# Altium PCB Main.PcbDoc (part 1 of 2)
Units mil, origin at the board's own origin, x right, y up, seen from the top; angles counter-clockwise.
Board outline 5112 x 2752 mil, 4 copper layers (Signal Layer 1, Ground Plane, Voltage Plane, Signal Layer 2), stack 40.4 mil thick; 233 components, 150 nets, 676 pads, 338 vias.
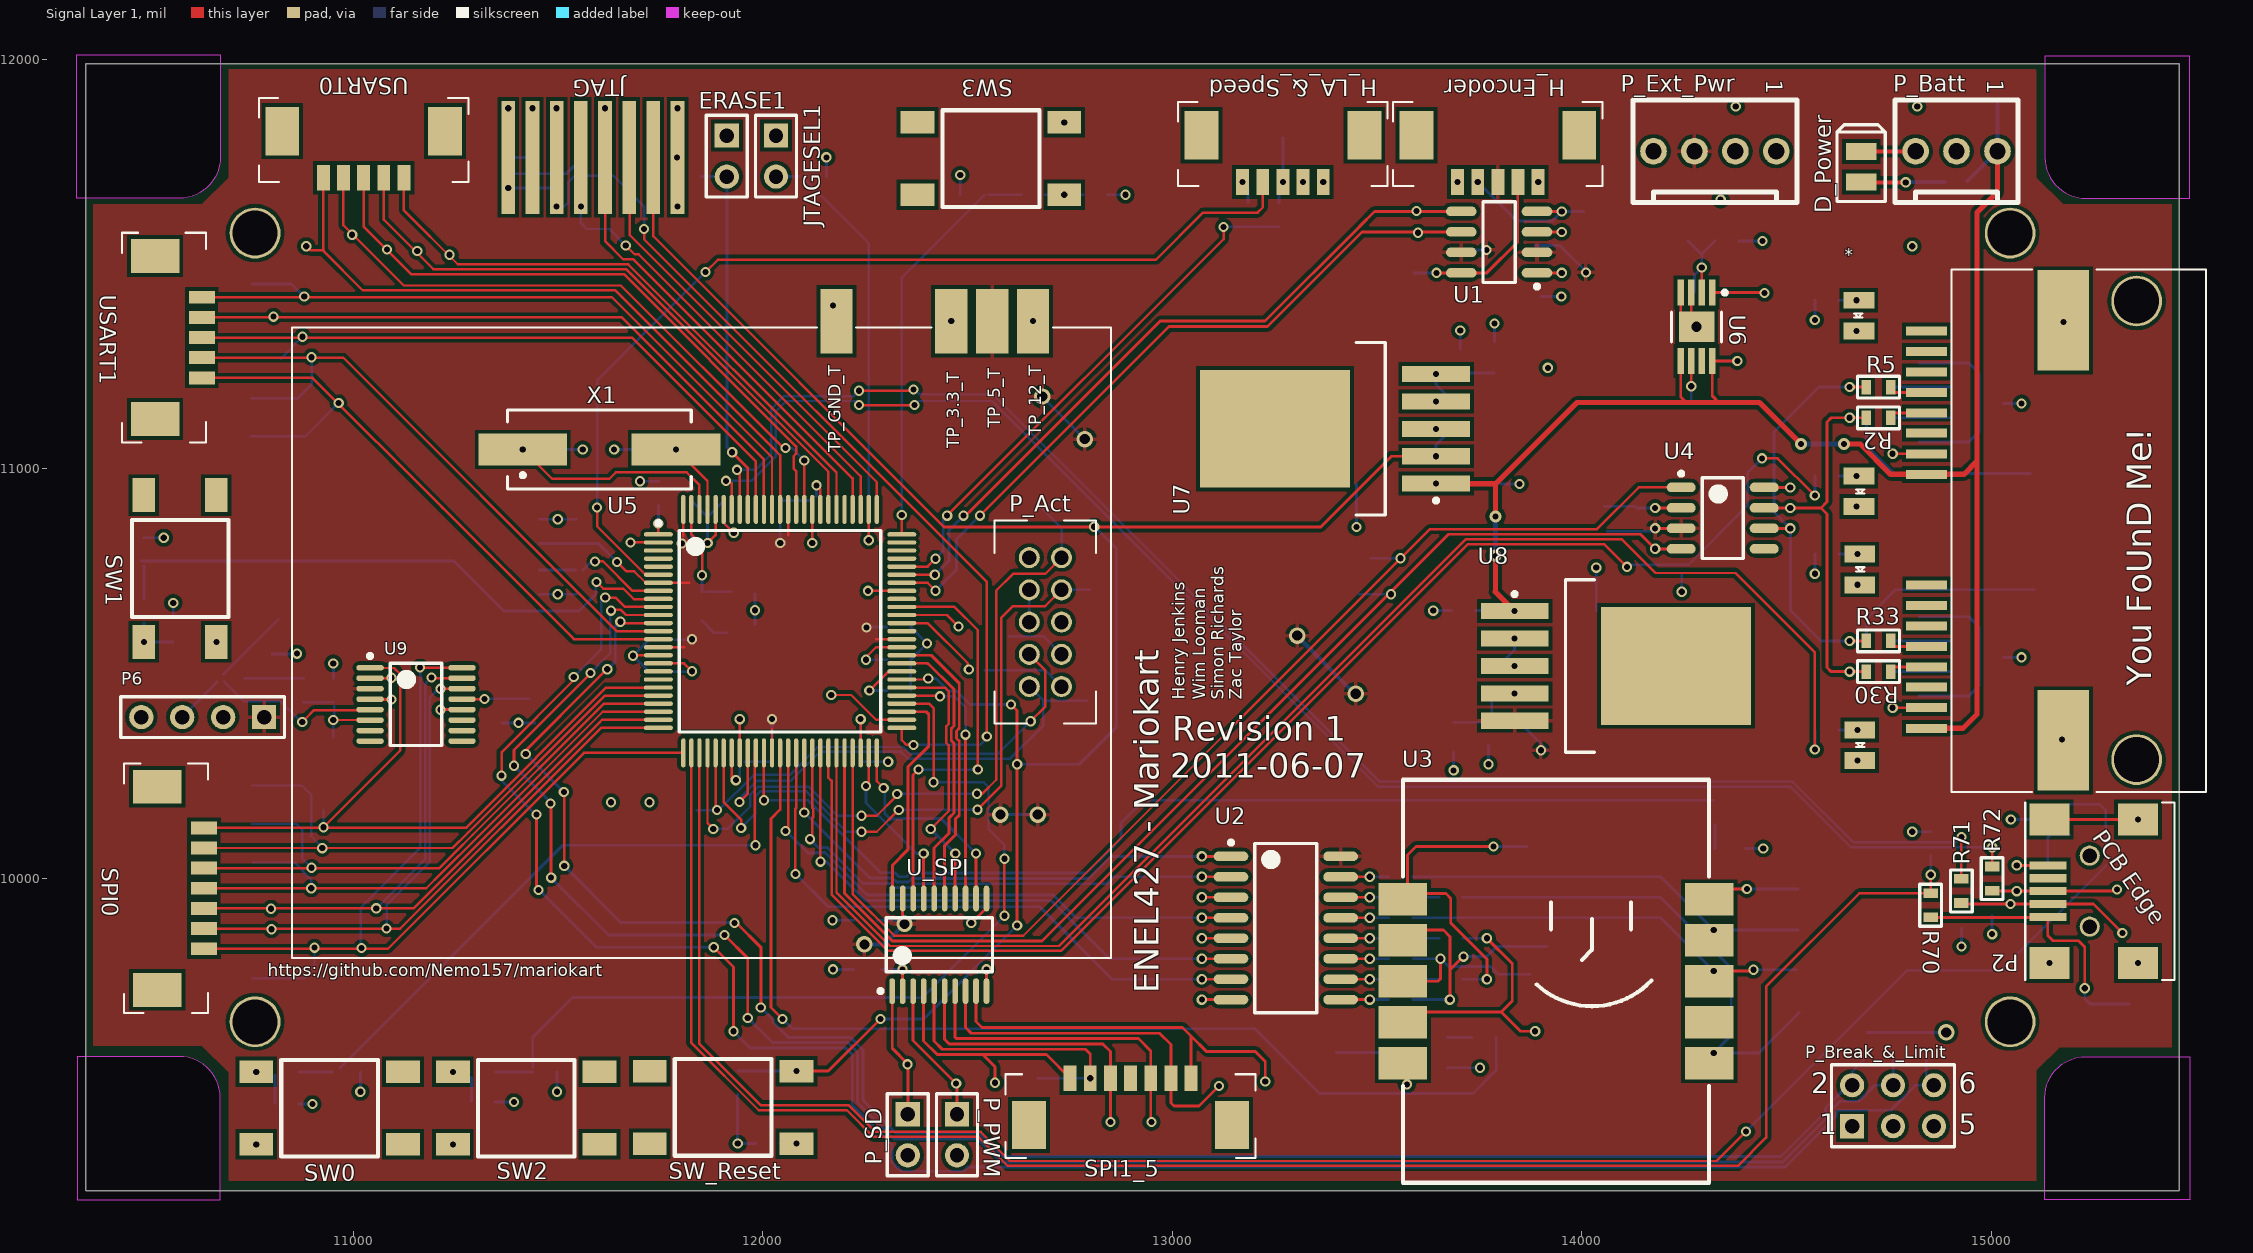
[diagram p0: Signal Layer 1 view]
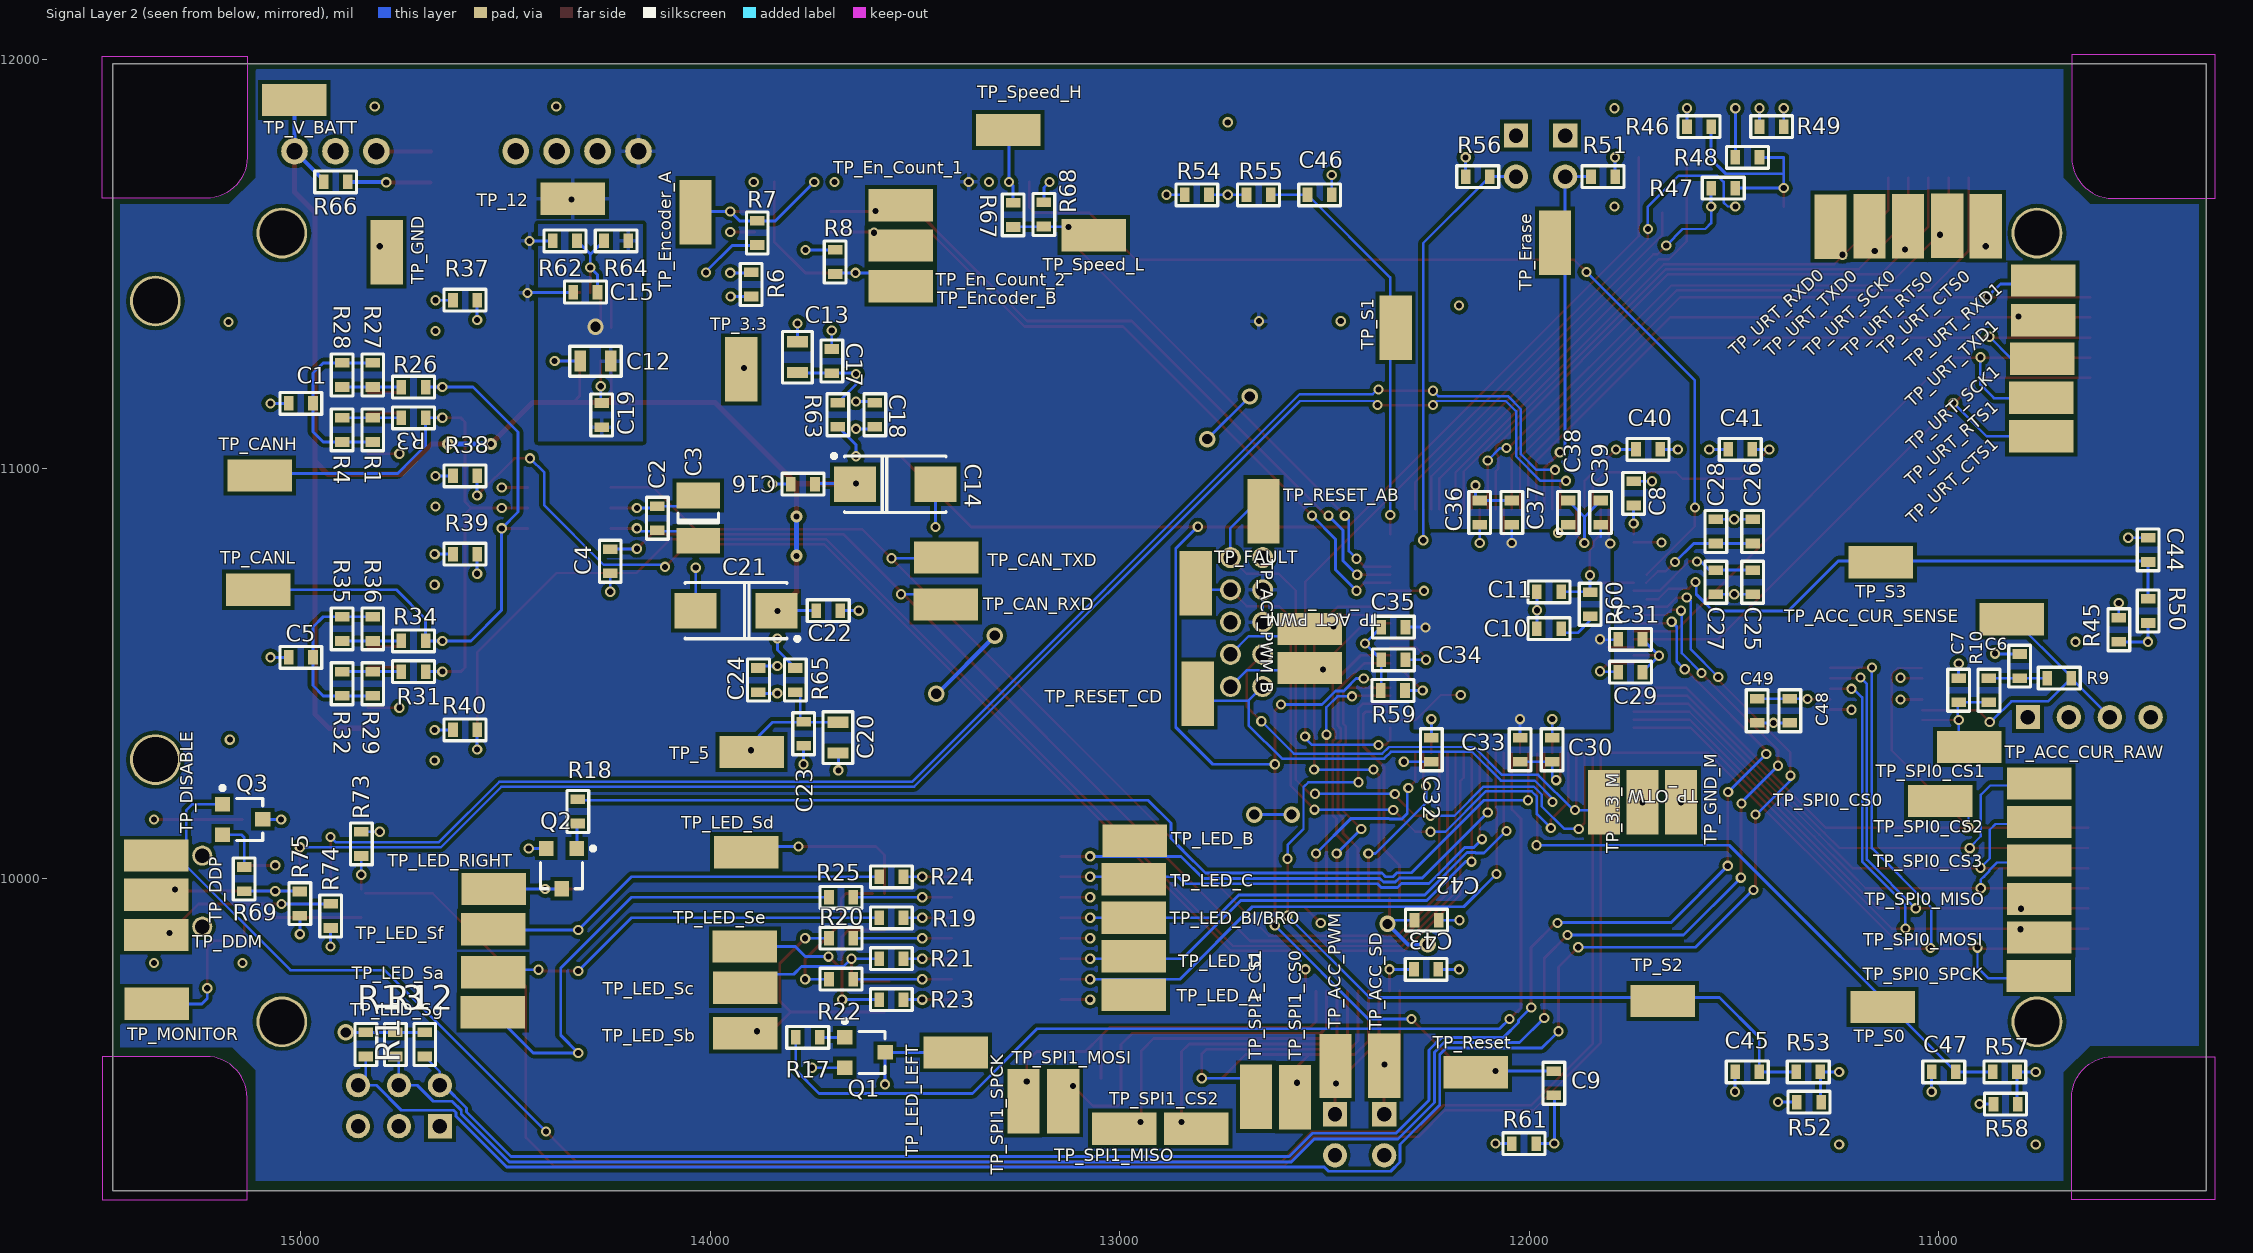
[diagram p1: Signal Layer 2 view, seen from below]
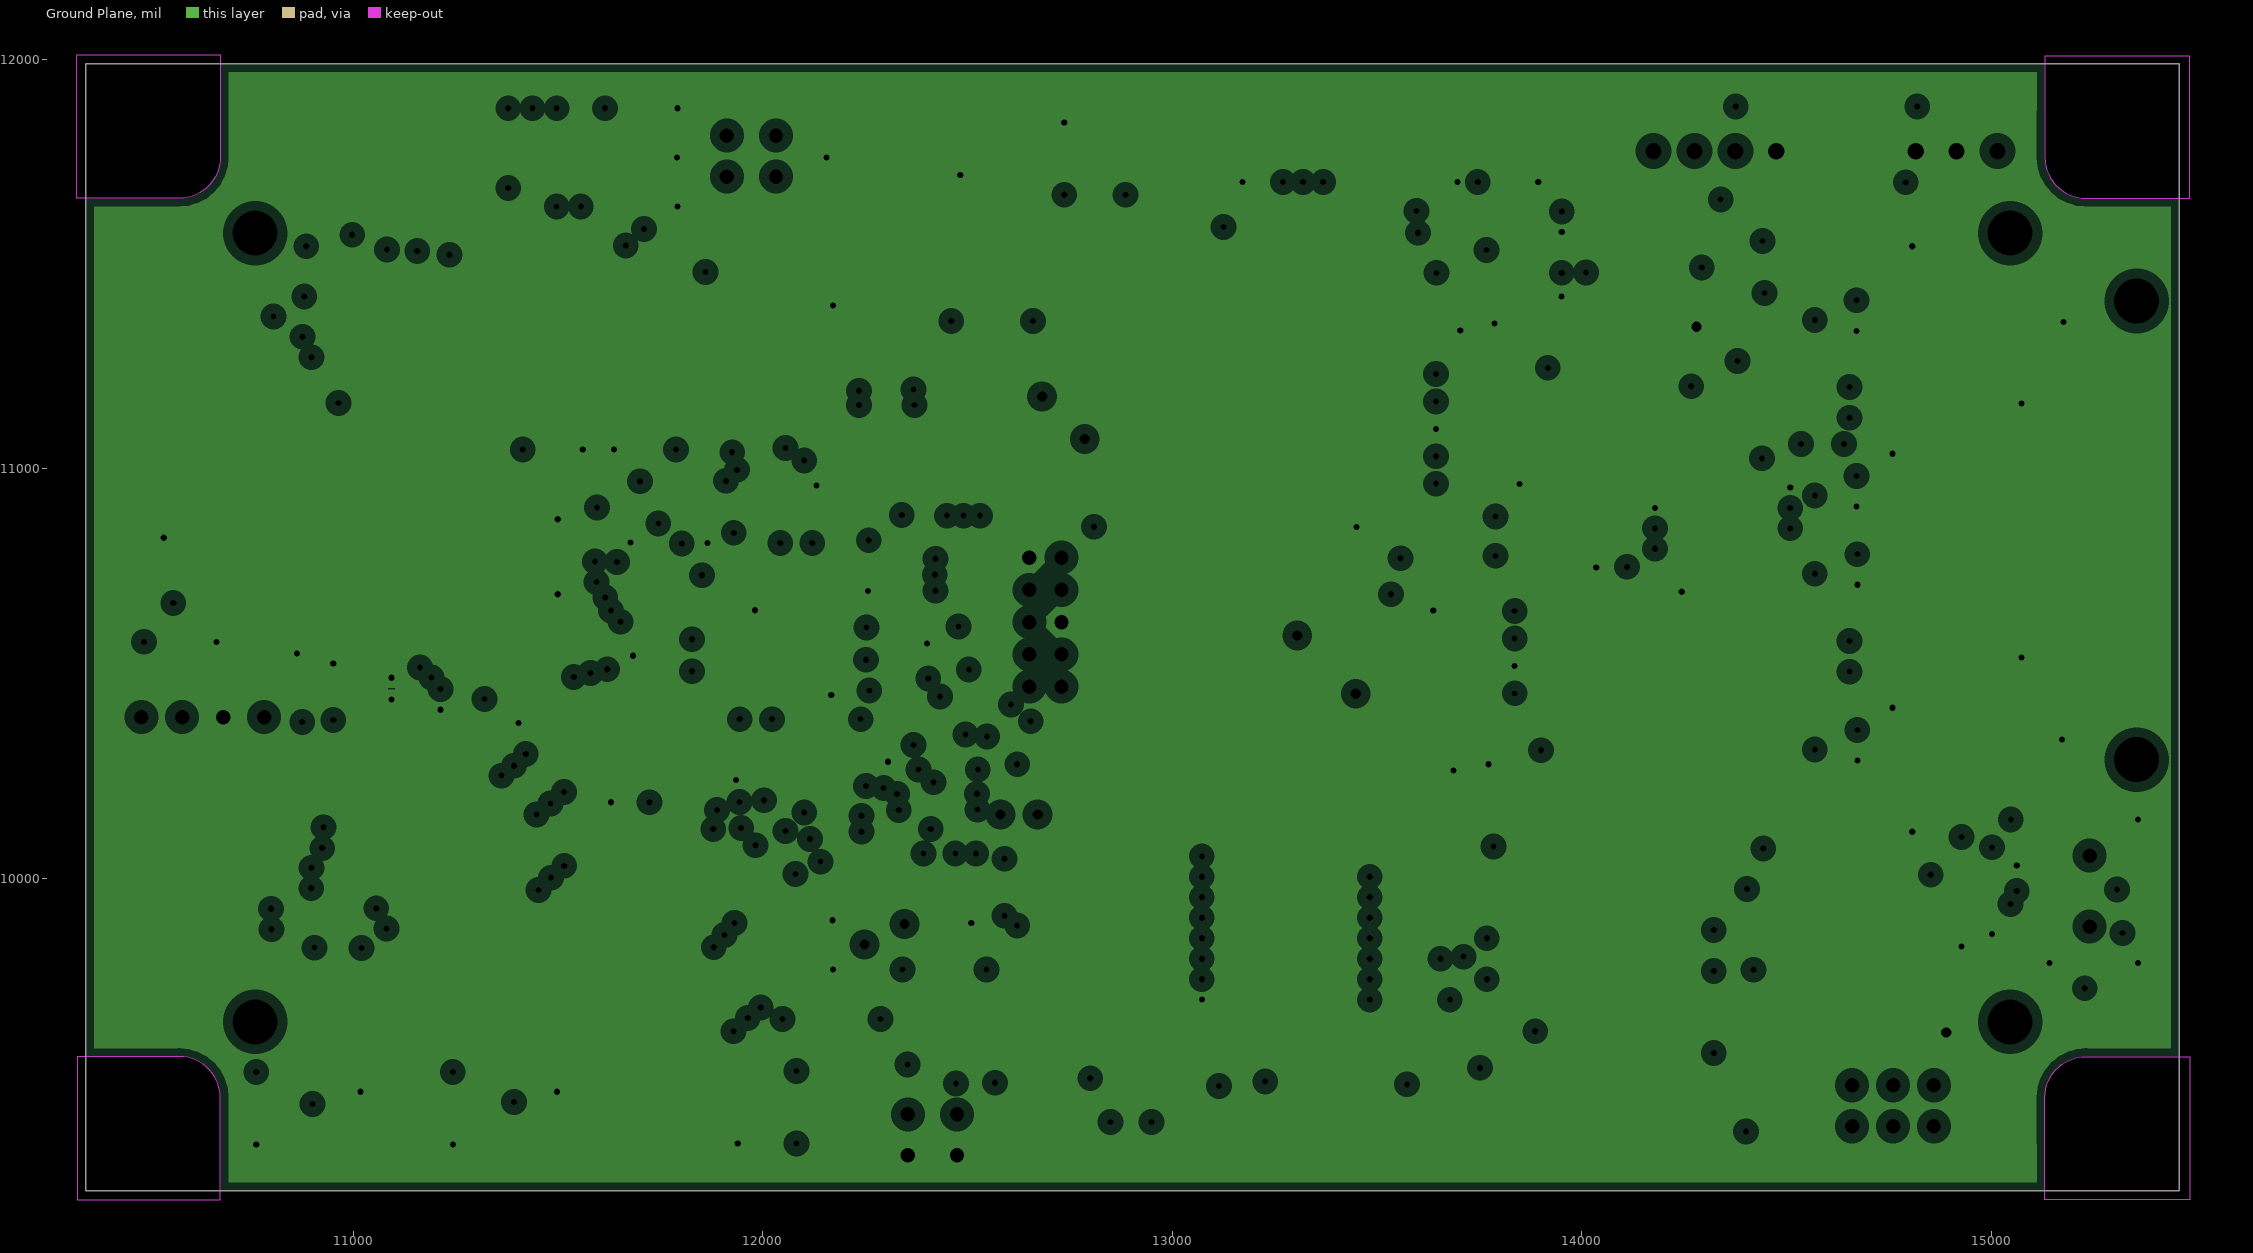
[diagram p2: Ground Plane, clearances drawn from the general rule]
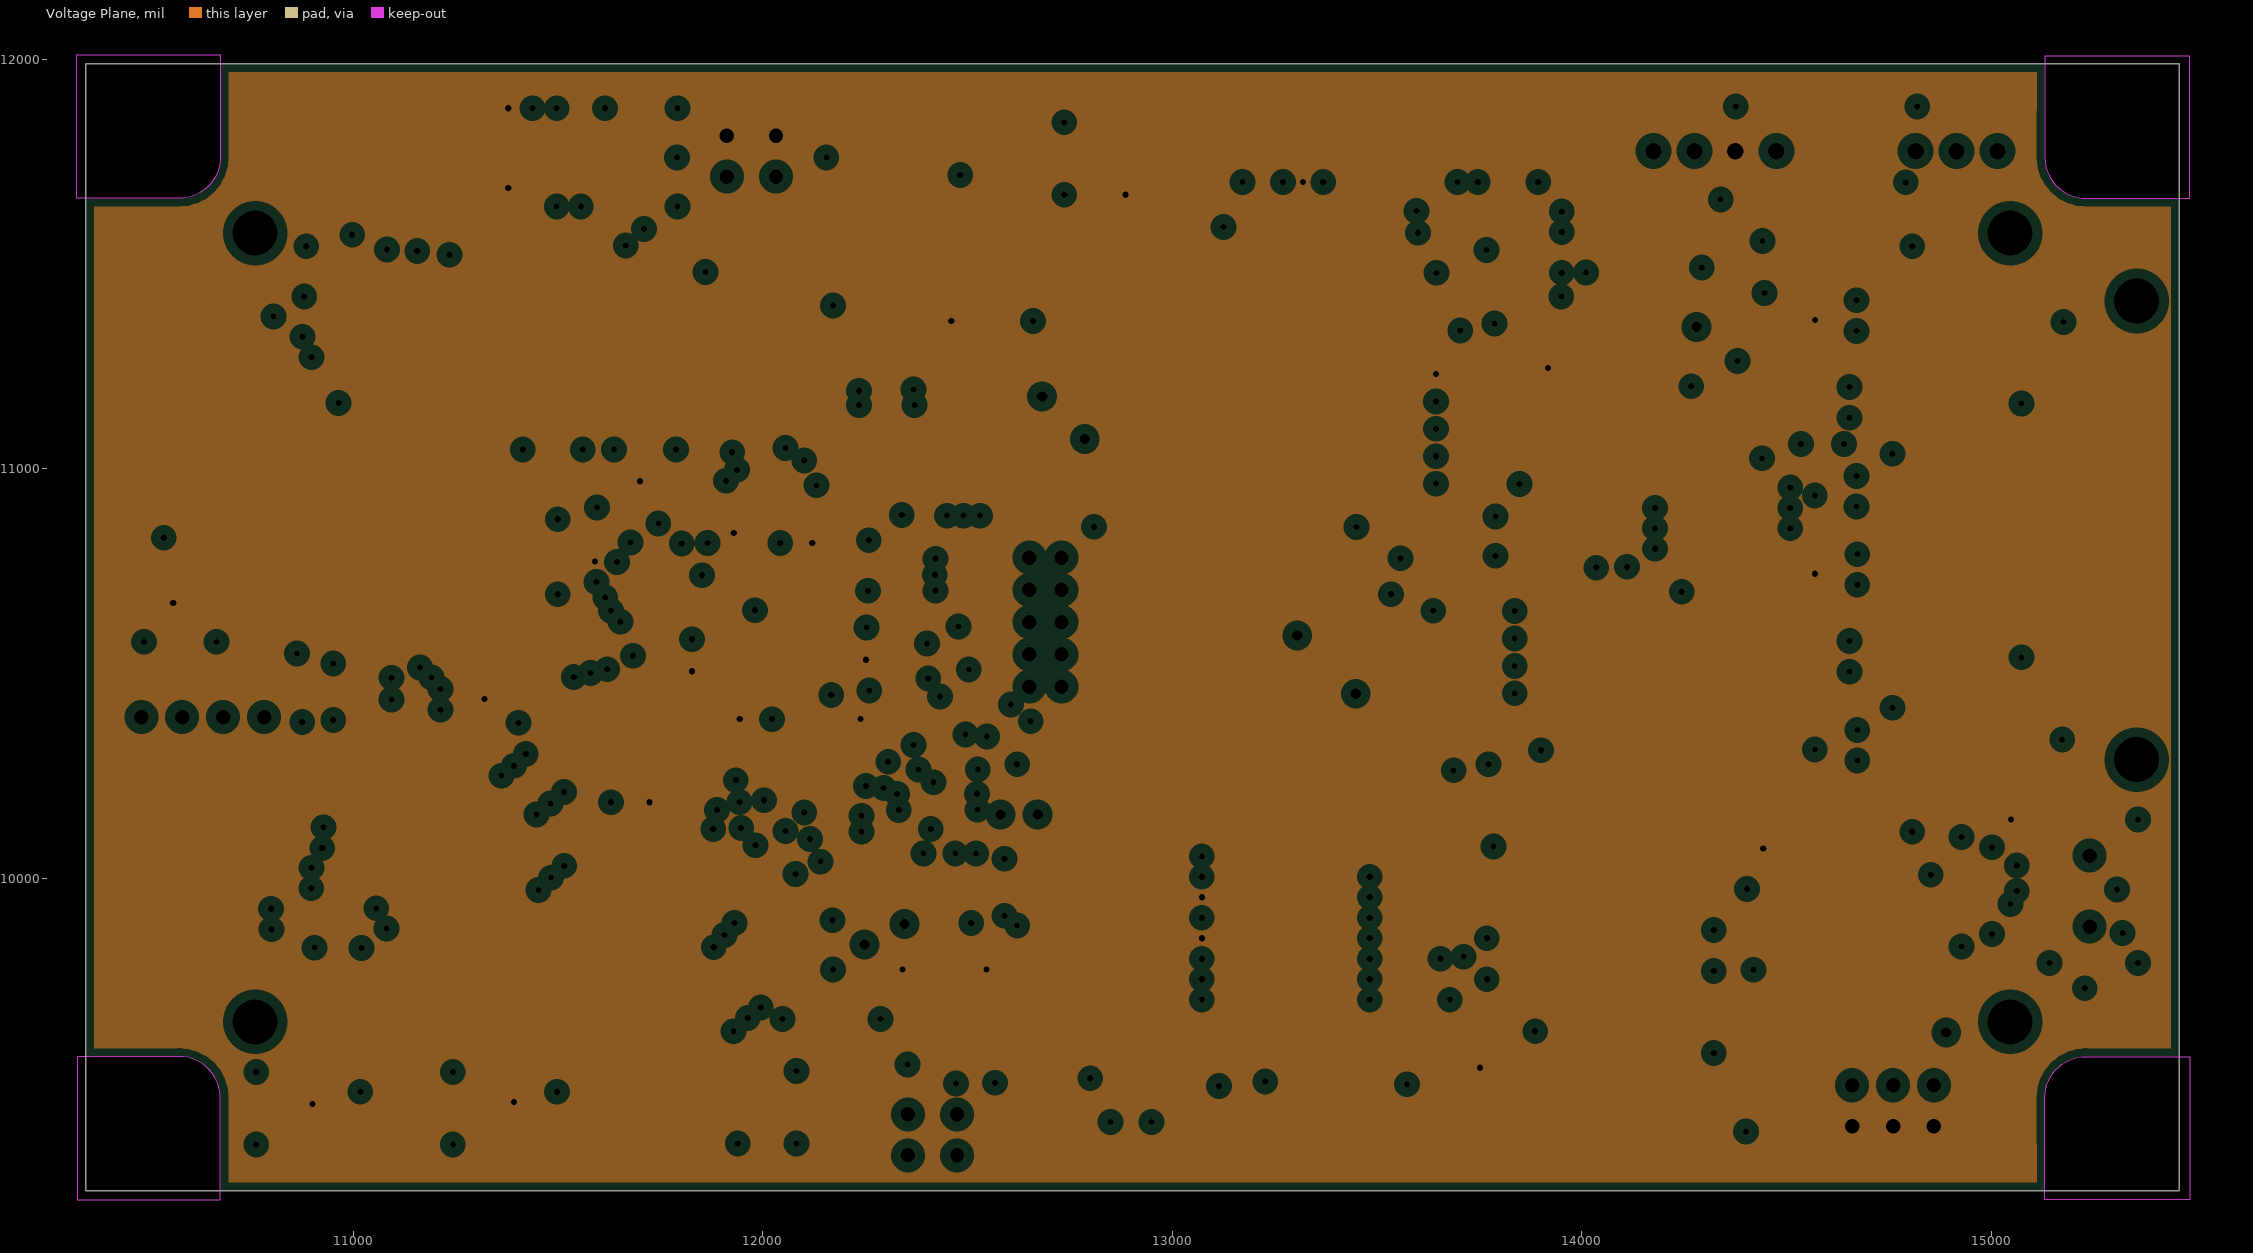
[diagram p3: Voltage Plane, clearances drawn from the general rule]

## Layer stack, top to bottom
Signal Layer 1: signal copper 1.35
Dielectric: prepreg 9.8, FR-4, Dk 4.8
Ground Plane: plane copper 1.35, net GND
Dielectric: core 12.6, FR-4, Dk 4.8
Voltage Plane: plane copper 1.35, net V_3.3
Dielectric: prepreg 12.6, FR-4, Dk 4.8
Signal Layer 2: signal copper 1.35

## Board outline
10347,11988 15459,11988 15459,9236 10347,9236
cut-out: 15484,12007 15131,12007 15131,11760 ccw(c15231,11760) 15231,11660 15484,11660
cut-out: 15484,9214 15131,9214 15131,9464 cw(c15231,9464) 15231,9564 15484,9564
cut-out: 10326,9214 10675,9214 10675,9464 ccw(c10575,9464) 10575,9564 10326,9564
cut-out: 10324,12011 10675,12011 10675,11760 cw(c10575,11760) 10575,11660 10324,11660

## Design rules (kind name [scope] priority, off if disabled: settings)
Clearance Clearance_Inner [(OnLayer('Mid-Layer 1') OR OnLayer('Mid-Layer 2'))] p1: gap=10
Clearance Clearance_Polygon [InPolygon] p2: gap=9
Clearance [All] p3: gap=6
HoleSize [All] p1: absolutevalues=TRUE maxlimit=200 minlimit=15 maxpercent=80.000 minpercent=20.000
MinimumAnnularRing MinimumAnnularRing_Via [(IsVia)] p1: minimumring=5
MinimumAnnularRing MinimumAnnularRing_Hole [(InComponent('*'))] p2: minimumring=7
MinimumSolderMaskSliver [All] p1: minsoldermaskwidth=3.94
NetAntennae [All] p1 off: netantennaetolerance=0
PasteMaskExpansion [All] p1 off: expansion=0
PlaneClearance [All] p1: clearance=24
PlaneConnect [All] p1: planeconnectstyle=Relief reliefexpansion=20 reliefentries=4 reliefconductorwidth=20 reliefairgap=10
PolygonConnect "Cooling Pad" [(InNet('GND') AND InComponent('U6'))] p1: connectstyle=Direct reliefconductorwidth=10 reliefentries=4 polygonreliefangle="90 Angle"
PolygonConnect "1.8V Plane" [InNet('V_1.8') vs InNet('V_1.8')] p2: connectstyle=Direct reliefconductorwidth=10 reliefentries=4 polygonreliefangle="90 Angle"
PolygonConnect [All] p3: connectstyle=Relief reliefconductorwidth=10 reliefentries=4 polygonreliefangle="90 Angle"
RoutingVias [All] p1: holewidth=15 width=25 viastyle="Through Hole" minholewidth=15 minwidth=25 maxholewidth=50 maxwidth=80
SMDNeckDown [All] p1: percent=60.000
SMDToCorner [All] p1: distance=200000
SilkToSilkClearance [All] p1 off: silktosilkclearance=5
SilkscreenOverComponentPads [All] p1 off: minsilkscreentomaskgap=5
SolderMaskExpansion [All] p1: expansion=2.5
Width [All] p1: maxlimit=200 minlimit=6 preferedwidth=8
20 further rules are at their usual default settings.

## Classes and differential pairs
component class "Student Board Replacemnet": C6 C7 C48 C49 C?? P6 P_PWM P_SD R9 R10 TP_ACC_CUR_RAW TP_ACC_CUR_SENSE TP_ACC_PWM TP_ACC_SD U9
component class "CAN Tranceiver": * C1 C2 C3 C4 C5 R1 R2 R3 R4 R5 R26 R27 R28 R29 R30 R31 R32 R33 R34 R35 R36 R37 R38 R39 R40 TP_CAN_RXD TP_CAN_TXD TP_CANH TP_CANL U4
component class Other: C8 C9 C10 C11 C40 C41 C44 C45 C46 C47 ERASE1 JTAG JTAGESEL1 R45 R46 R47 R48 R49 R50 R51 R52 R53 R54 R55 R56 R57 R58 R59 R60 R61 SW0 SW1 SW2 SW3 SW_Reset TP_Erase TP_Reset TP_S0 TP_S1 TP_S2 TP_S3 X1
component class "Power Supply": C12 C13 C14 C15 C16 C17 C18 C19 C20 C21 C22 C23 C24 C25 C26 C27 C28 C29 C30 C31 C32 C33 C34 C35 C36 C37 C38 C39 D_Power P? P_Batt P_Ext_Pwr R62 R63 R64 R65 R66 TP_3.3 TP_3.3_M TP_3.3_T TP_5 TP_5_M TP_5_T TP_12 TP_12_T TP_GND TP_GND_M TP_GND_T TP_MCU_3.3 TP_MCU_V_3.3 TP_V_BATT U6 U7 U8
component class "USB Connector": P2 Q3 R69 R70 R71 R72 R73 R74 R75 TP_DDM TP_DDP TP_DISABLE TP_MONITOR
component class Sensors: H_Encoder H_LA_&_Speed R6 R7 R8 R67 R68 TP_En_Count_1 TP_En_Count_2 TP_Encoder_A TP_Encoder_B TP_Speed_H TP_Speed_L U1
component class "LED Display": Q1 Q2 R17 R18 R19 R20 R21 R22 R23 R24 R25 TP_LED_A TP_LED_B TP_LED_BI/BRO TP_LED_C TP_LED_D TP_LED_LEFT TP_LED_RIGHT TP_LED_Sa TP_LED_Sb TP_LED_Sc TP_LED_Sd TP_LED_Se TP_LED_Sf TP_LED_Sg U2 U3
component class Main: C42 C43 P_Act P_Break_&_Limit R11 R12 R13 SPI0 SPI1_5 TP_ACT_PWM TP_ACT_PWM_B TP_FAULT TP_OTW TP_RESET_AB TP_RESET_CD TP_SPI0_CS0 TP_SPI0_CS1 TP_SPI0_CS2 TP_SPI0_CS3 TP_SPI0_MISO TP_SPI0_MOSI TP_SPI0_SPCK TP_SPI1_CS0 TP_SPI1_CS1 TP_SPI1_CS2 TP_SPI1_MISO TP_SPI1_MOSI TP_SPI1_SPCK TP_URT_CTS0 TP_URT_CTS1 TP_URT_RTS0 TP_URT_RTS1 TP_URT_RXD0 TP_URT_RXD1 TP_URT_SCK0 TP_URT_SCK1 TP_URT_TXD0 TP_URT_TXD1 U5 U_SPI USART0 USART1

## Components (designator, comment, footprint, x,y, rotation, side; value= is the part's Value field where it differs from the comment)
* "RJSSE-5381-02" RJSSE-5381-02 15355,10289 r90 top
C1 "10nF" 0603 15029,11159 r180 bottom
C2 "100nF" 0603 14129,10849 r90 bottom
C3 "47uF 10V" 1210 14029,10879 r90 bottom
C4 "16pF" 0603 14244,10744 r90 bottom
C5 "10nF" 0603 15029,10539 r180 bottom
C6 "100nF" 0603 10802,10547 r270 bottom
C7 "100nF" 0603 10951,10488 r270 bottom
C8 "100pF-603" "0603 Resistor" 11745,10940 r180 bottom
C9 "100nF" 0603 11939.52,9528.48 r270 bottom
C10 "100pF-603" "0603 Resistor" 11951,10609 r270 bottom
C11 "100pF-603" "0603 Resistor" 11951,10699 r270 bottom
C12 "10uF" 0805 14280.07,11261.13 r0 bottom
C13 "10uF" 0805 13788,11272 r90 bottom
C14 "CP_TANT_22uF" 6032 13548,10962 r180 bottom
C15 "10nF" 0603 14275.07,11431.13 r0 bottom
C16 "100nF" 0603 13803,10962 r180 bottom
C17 "100nF" 0603 13703,11292 r270 bottom
C18 "100nF" 0603 13598,11102 r90 bottom
C19 "10nF" 0603 14265.07,11101.13 r90 bottom
C20 "10uF" 0805 13687,10343 r270 bottom
C21 "CP_TANT_22uF" 6032 13937,10653 r0 bottom
C22 "100nF" 0603 13682,10653 r0 bottom
C23 "100nF" 0603 13772,10323 r90 bottom
C24 "100nF" 0603 13882,10513 r270 bottom
C25 "100nF" 0603 11454,10752 r270 bottom
C26 "100nF" 0603 11454,10817 r90 bottom
C27 "4u7" 0603 11544,10752 r270 bottom
C28 "2u2" 0603 11544,10817 r90 bottom
C29 "100nF" 0603 11782,10503 r180 bottom
C30 "100nF" 0603 11943.57,10343 r270 bottom
C31 "100nF" 0603 11782,10583 r180 bottom
C32 "100nF" 0603 12238.85,10343 r270 bottom
C33 "100nF" 0603 12022,10343 r270 bottom
C34 "100nF" 0603 12302,10533 r0 bottom
C35 "100nF" 0603 12302,10613 r0 bottom
C36 "100nF" 0603 12120.74,10863 r90 bottom
C37 "100nF" 0603 12042,10863 r90 bottom
C38 "100nF" 0603 11904.2,10863 r90 bottom
C39 "100nF" 0603 11825.15,10863 r90 bottom
C40 "16pF" 0603 11680,11046.78 r0 bottom
C41 "16pF" 0603 11455,11046.78 r0 bottom
C42 "100nF" 0603 12221,9897 r0 bottom
C43 "100nF" 0603 12281,9777 r180 bottom
C44 "100nF" 0603 10488.52,10831 r270 bottom
C45 "100nF" 0603 11497,9526.48 r180 bottom
C46 "100nF" 0603 12482,11668.52 r0 bottom
C47 "100nF" 0603 11017,9526.48 r180 bottom
C48 "CP_75pF 0603" 0603 11363,10379 r90 bottom
C49 "1uF" 0603 11443,10379 r90 bottom
D_Power "LED Green" DIODE_0805 14682,11737 r90 top
ERASE1 "Header 2" HDR1X2 11912,11813 r270 top
H_Encoder "53261-0571" 53261-0571 13795,11700 r180 top (schematic designator H2)
H_LA_&_Speed "53261-0571" 53261-0571 13270,11700 r180 top (schematic designator H1)
JTAG "87437-0843" 87437-0843 11585,11760 r180 top
JTAGESEL1 "Header 2" HDR1X2 12032,11813 r270 top
P2 "USB Mini-B" "USB Mini-B" 15447,9968 r180 top
P6 "RGBLED" HDR1X4 10782,10393 r180 top
P_Act "87831-1041" 87831-1041 12690,10625 r270 top
P_Batt "3 Pin Molex KK Hdr" G_MOLEX_KK_3_HDR 15015,11775 r270 top
P_Break_&_Limit "Header 3X2" HDR2X3 14660,9394 r0 top (schematic designator P1)
P_Ext_Pwr "4 Pin Molex KK Hdr" G_MOLEX_KK_4_HDR 14475,11775 r270 top
P_PWM "Header 2" HDR1X2 12474,9423 r270 top
P_SD "Header 2" HDR1X2 12354,9423 r270 top
Q1 "ZXM61P02F" SOT23 13622,9574 r270 bottom
Q2 "ZXM61P02F" SOT23 14363,10023 r0 bottom
Q3 "ZXM61P02F" SOT23 15141.88,10143.2 r270 bottom
R1 "100R" 0603 14824,11124 r270 bottom
R2 "0R0" 0603 14754,11124 r180 top
R3 "0R0" 0603 14694.94,11124 r0 bottom
R4 "100R" 0603 14899,11124 r270 bottom
R5 "0R0" 0603 14754,11199 r180 top
R6 "RS_12M_603" "0603 Resistor" 13900,11450 r180 bottom
R7 "1K" 0603 13885,11605 r270 bottom
R8 "1K" 0603 13695,11475 r90 bottom
R9 "6k81" 0603 10676,10488 r0 bottom
R10 "3k9" 0603 10877,10488 r270 bottom
R11 "10k" 0603 14697,9564 r90 bottom
R12 "10k" 0603 14769,9564 r90 bottom
R13 "10k" 0603 14841,9564 r90 bottom
R17 "180R" 0603 13732,9611 r0 bottom
R18 "180R" 0603 14323,10133 r90 bottom
R19 "150R" 0603 13587,9903 r180 bottom
R20 "150R" 0603 13710,9853 r180 bottom
R21 "150R" 0603 13587,9803 r180 bottom
R22 "150R" 0603 13710,9753 r180 bottom
R23 "150R" 0603 13587,9703 r180 bottom
R24 "150R" 0603 13587,10003 r180 bottom
R25 "150R" 0603 13710,9953 r180 bottom
R26 "0R0" 0603 14694.94,11199 r0 bottom
R27 "100R" 0603 14824,11199 r90 bottom
R28 "100R" 0603 14899,11199 r90 bottom
R29 "100R" 0603 14824,10504 r270 bottom
R30 "0R0" 0603 14754,10504 r180 top
R31 "0R0" 0603 14694.94,10504 r0 bottom
R32 "100R" 0603 14899,10504 r270 bottom
R33 "0R0" 0603 14754,10579 r180 top
R34 "0R0" 0603 14694.94,10579 r0 bottom
R35 "100R" 0603 14899,10579 r90 bottom
R36 "100R" 0603 14824,10579 r90 bottom
R37 "560R" 0603 14569,11411.05 r0 bottom
R38 "560R" 0603 14569,10981.91 r0 bottom
R39 "560R" 0603 14569,10790.97 r0 bottom
R40 "560R" 0603 14569,10361.83 r0 bottom
R45 "10k" 0603 10560,10577 r90 bottom
R46 "100K" 0603 11555.47,11835 r0 bottom
R47 "100K" 0603 11496.42,11685 r0 bottom
R48 "100K" 0603 11437.36,11760 r0 bottom
R49 "100K" 0603 11378.31,11835 r0 bottom
R50 "330R" 0603 10488.52,10622.73 r90 bottom
R51 "1K" 0603 11790,11713 r0 bottom
R52 "10k" 0603 11287,9453 r0 bottom
R53 "330R" 0603 11288.73,9526.48 r0 bottom
R54 "10k" 0603 12782,11668.52 r0 bottom
R55 "330R" 0603 12690.27,11668.52 r180 bottom
R56 "1K" 0603 12155,11713 r180 bottom
R57 "10k" 0603 10807,9448 r0 bottom
R58 "330R" 0603 10808.73,9526.48 r0 bottom
R59 "1K" 0603 12362,10458 r180 bottom
R60 "1k" 0603 11851,10639 r90 bottom
R61 "330R" 0603 11983,9351.52 r0 bottom
R62 "30k" 0603 14325.07,11556.13 r0 bottom
R63 "10k" 0603 13688,11102 r90 bottom
R64 "3k3" 0603 14200.07,11556.13 r0 bottom
R65 "10k" 0603 13792,10513 r270 bottom
R66 "2k7" 0603 14885,11700 r0 bottom
R67 "220K" 0603 13260,11590 r90 bottom
R68 "470K" 0603 13185,11650 r270 bottom
R69 "1K5" 0603 15137.94,9968 r90 bottom
R70 "27K" 0603 14852,9963 r270 top
R71 "27R" 0603 14927,9998 r270 top
R72 "27R" 0603 15002,10028 r270 top
R73 "47K" 0603 14852,10113 r270 bottom
R74 "330K" "0603 Resistor" 14927,9908 r180 bottom
R75 "330K" "0603 Resistor" 15002,9938 r180 bottom
SPI0 "53261-0771" 53261-0771 10635,9975 r270 top
SPI1_5 "53261-0771" 53261-0771 12898,9511 r0 top
SW0 "FSM2JSMA" FSM2JSMA 10942,9438 r270 top
SW1 "FSM2JSMA" FSM2JSMA 10577,10756 r0 top
SW2 "FSM2JSMA" FSM2JSMA 11422,9438 r270 top
SW3 "FSM2JSMA" FSM2JSMA 12557,11757 r90 top
SW_Reset "FSM2JSMA" FSM2JSMA 11903,9440 r90 top
TP_3.3 "TP" TEST_POINT_4X2MM 13924,11242 r270 bottom
TP_3.3_M "TP" TEST_POINT_4X2MM 11723,10185 r270 bottom
TP_3.3_T "TP" TEST_POINT_4X2MM 12460,11360 r90 top
TP_5 "TP" TEST_POINT_4X2MM 13899,10308 r0 bottom
TP_5_T "TP" TEST_POINT_4X2MM 12560,11360 r270 top
TP_12 "TP" TEST_POINT_4X2MM 14336,11659 r0 bottom
TP_12_T "TP" TEST_POINT_4X2MM 12660,11360 r90 top
TP_ACC_CUR_RAW "TP" TEST_POINT_4X2MM 10925,10320 r0 bottom
TP_ACC_CUR_SENSE "TP" TEST_POINT_4X2MM 10821,10632 r0 bottom
TP_ACC_PWM "TP" TEST_POINT_4X2MM 12473,9541 r270 bottom
TP_ACC_SD "TP" TEST_POINT_4X2MM 12354,9542 r270 bottom
TP_ACT_PWM "TP" TEST_POINT_4X2MM 12536,10513 r180 bottom
TP_ACT_PWM_B "TP" TEST_POINT_4X2MM 12536,10608 r180 bottom
TP_CAN_RXD "TP" TEST_POINT_4X2MM 13425,10668 r180 bottom
TP_CAN_TXD "TP" TEST_POINT_4X2MM 13424,10783 r0 bottom
TP_CANH "TP" TEST_POINT_4X2MM 15100,10983 r0 bottom
TP_CANL "TP" TEST_POINT_4X2MM 15104,10704 r0 bottom
TP_DDM "TP" TEST_POINT_4X2MM 15353,9861 r0 bottom
TP_DDP "TP" TEST_POINT_4X2MM 15353,9959 r0 bottom
TP_DISABLE "TP" TEST_POINT_4X2MM 15353,10055 r0 bottom
TP_En_Count_1 "TP" TEST_POINT_4X2MM 13534,11643 r0 bottom
TP_En_Count_2 "TP" TEST_POINT_4X2MM 13535,11545 r0 bottom
TP_Encoder_A "TP" TEST_POINT_4X2MM 14036,11626 r270 bottom
TP_Encoder_B "TP" TEST_POINT_4X2MM 13535,11445 r0 bottom
TP_Erase "TP" TEST_POINT_4X2MM 11937,11552 r90 bottom
TP_FAULT "TP" TEST_POINT_4X2MM 12814,10720 r270 bottom
TP_GND "TP" TEST_POINT_4X2MM 14790,11528 r270 bottom
TP_GND_M "TP" TEST_POINT_4X2MM 11629,10185 r270 bottom
TP_GND_T "TP" TEST_POINT_4X2MM 12180,11360 r90 top
TP_LED_A "TP" TEST_POINT_4X2MM 12965,9715 r0 bottom
TP_LED_B "TP" TEST_POINT_4X2MM 12963,10091 r0 bottom
TP_LED_BI/BRO "TP" TEST_POINT_4X2MM 12965,9903 r0 bottom
TP_LED_C "TP" TEST_POINT_4X2MM 12965,9997 r0 bottom
TP_LED_D "TP" TEST_POINT_4X2MM 12965,9809 r0 bottom
TP_LED_LEFT "TP" TEST_POINT_4X2MM 13400,9574 r0 bottom
TP_LED_RIGHT "TP" TEST_POINT_4X2MM 14528,9973 r0 bottom
TP_LED_Sa "TP" TEST_POINT_4X2MM 14530,9770 r0 bottom
TP_LED_Sb "TP" TEST_POINT_4X2MM 13914,9621 r0 bottom
TP_LED_Sc "TP" TEST_POINT_4X2MM 13914,9732 r0 bottom
TP_LED_Sd "TP" TEST_POINT_4X2MM 13912,10063 r180 bottom
TP_LED_Se "TP" TEST_POINT_4X2MM 13915,9833 r0 bottom
TP_LED_Sf "TP" TEST_POINT_4X2MM 14530,9875 r0 bottom
TP_LED_Sg "TP" TEST_POINT_4X2MM 14531,9672 r0 bottom
TP_MONITOR "TP" TEST_POINT_4X2MM 15351,9693 r0 bottom
TP_OTW "TP" TEST_POINT_4X2MM 11817,10185 r270 bottom
TP_Reset "TP" TEST_POINT_4X2MM 12130,9526 r0 bottom
TP_RESET_AB "TP" TEST_POINT_4X2MM 12649,10896 r90 bottom
TP_RESET_CD "TP" TEST_POINT_4X2MM 12809,10450 r90 bottom
TP_S0 "TP" TEST_POINT_4X2MM 11137,9685 r0 bottom
TP_S1 "TP" TEST_POINT_4X2MM 12326,11344 r270 bottom
TP_S2 "TP" TEST_POINT_4X2MM 11674,9700 r0 bottom
TP_S3 "TP" TEST_POINT_4X2MM 11141,10771 r0 bottom
TP_Speed_H "TP" TEST_POINT_4X2MM 13272,11827 r0 bottom
TP_Speed_L "TP" TEST_POINT_4X2MM 13063,11570 r0 bottom
TP_SPI0_CS0 "TP" TEST_POINT_4X2MM 10996,10188 r180 bottom
TP_SPI0_CS1 "TP" TEST_POINT_4X2MM 10754,10231 r0 bottom
TP_SPI0_CS2 "TP" TEST_POINT_4X2MM 10754,10137 r0 bottom
TP_SPI0_CS3 "TP" TEST_POINT_4X2MM 10754,10043 r0 bottom
TP_SPI0_MISO "TP" TEST_POINT_4X2MM 10754,9949 r0 bottom
TP_SPI0_MOSI "TP" TEST_POINT_4X2MM 10754,9855 r0 bottom
TP_SPI0_SPCK "TP" TEST_POINT_4X2MM 10755,9761 r0 bottom
TP_SPI1_CS0 "TP" TEST_POINT_4X2MM 12572,9465 r270 bottom
TP_SPI1_CS1 "TP" TEST_POINT_4X2MM 12667,9466 r270 bottom
TP_SPI1_CS2 "TP" TEST_POINT_4X2MM 12813,9388 r0 bottom
TP_SPI1_MISO "TP" TEST_POINT_4X2MM 12989,9388 r0 bottom
TP_SPI1_MOSI "TP" TEST_POINT_4X2MM 13138,9455 r270 bottom
TP_SPI1_SPCK "TP" TEST_POINT_4X2MM 13235,9455 r270 bottom
TP_URT_CTS0 "TP" TEST_POINT_4X2MM 10885,11592 r270 bottom
TP_URT_CTS1 "TP" TEST_POINT_4X2MM 10749,11079 r0 bottom
TP_URT_RTS0 "TP" TEST_POINT_4X2MM 10979,11593 r270 bottom
TP_URT_RTS1 "TP" TEST_POINT_4X2MM 10749,11173 r0 bottom
TP_URT_RXD0 "TP" TEST_POINT_4X2MM 11264,11591 r270 bottom
TP_URT_RXD1 "TP" TEST_POINT_4X2MM 10744,11459 r0 bottom
TP_URT_SCK0 "TP" TEST_POINT_4X2MM 11075,11592 r270 bottom
TP_URT_SCK1 "TP" TEST_POINT_4X2MM 10747,11268 r0 bottom
TP_URT_TXD0 "TP" TEST_POINT_4X2MM 11169,11592 r270 bottom
TP_URT_TXD1 "TP" TEST_POINT_4X2MM 10745,11362 r0 bottom
TP_V_BATT "TP" TEST_POINT_4X2MM 15016,11900 r0 bottom
U1 "LS7083" SOIC127P600-8L 13798,11553 r180 top
U2 "SN74LS47" SOP127P780X200-16N 13277,9878 r0 top
U3 "HDSM-541C" HDSM-541C 13937,9748 r90 top
U4 "ATA6660" SOIC127P600X150-8N 14344,10879 r0 top
U5 "AT91SAM7X256-AU" LQFP100_N 12042,10603 r0 top
U6 "TSP7A4901" TSOP65P490X110_HS-8N 14280.07,11346.13 r270 top
U7 "TPS7A6033-Q1" TO170P1524X483-6N 13398,11097 r180 top
U8 "TPS7A6050-Q1" TO170P1524X483-6N 14082,10518 r0 top
U9 "ADC78H89CIMT" MTC16_N 11153,10424 r0 top
U_SPI "MAX3001EEUP+" TSOP65P640X110-20N 12431,9837 r90 top
USART0 "53261-0571" 53261-0571 11025,11710 r180 top
USART1 "53261-0571" 53261-0571 10630,11320 r270 top
X1 "ECS-184-20-5PXDU-TR" HC49/US 11607,11053 r270 top

## Footprints (in the part's own frame and the unit in brackets; to place one, negate y for a bottom-side part, rotate by r counter-clockwise, add the part's x,y. Pads: shape width x height; smd on the part's side, far side on the other; paste and mask are expansions set on the pad)
0603 [mm] "Non polarized 0603 footprint"
  rect 0.6x0.9 smd: 1(0,0) 2(1.5,0)
  silkscreen extent -0.55,-0.67 2.05,0.67
"0603 Resistor" [mm]
  rect 0.9x0.6 smd: 1(0,-0.762) 2(0,0.738)
  silkscreen extent -0.67,-1.31 0.67,1.29
0805 [mm]
  rect 0.7x1.3 smd: 1(-0.95,-0.025) 2(0.95,-0.025)
  silkscreen extent -1.6,-0.95 1.6,0.9
1210 [mm] "Chip Capacitor; Body 3.2 x 2.5 mm (LxW typ)"
  rect 1.6x2.7 smd: 1(-1.4,0) 2(1.4,0)
  silkscreen extent -0.3,-1.25 0.3,1.25
6032 [mm] "6032 polarized footprint"
  rect 2.6x2.2 smd: 1(-2.503,-0.003) 2(2.497,-0.003)
  silkscreen extent -3.93,-1.75 3.15,1.87
53261-0571 [mm] "5-pin PicoBlade Right-angle header"
  rect 2.1x3 smd: 0(-5.05,-2.9) 0(5.05,-2.9)
  rect 0.8x1.6 smd: 1(2.5,0) 2(1.25,0) 3(0,0) 4(-1.25,0) 5(-2.5,0)
  silkscreen extent -6.5,-4.95 6.5,0.25, body extent -6.5,-4.95 6.5,0.25, height 3.4
53261-0771 [mm] "7 pin PicoBlade right-angle header"
  rect 2.1x3 smd: 0(-6.3,-2.9) 0(6.3,-2.9)
  rect 0.8x1.6 smd: 1(3.75,0) 2(2.5,0) 3(1.25,0) 4(0,0) 5(-1.25,0) 6(-2.5,0) 7(-3.75,0)
  silkscreen extent -7.75,-4.95 7.75,0.25, body extent -7.75,-4.95 7.75,0.25, height 3.4
87437-0843 [mm]
  rect 0.85x7 smd: 1(5.25,0) 2(3.75,0) 3(2.25,0) 4(0.75,0) 5(-0.75,0) 6(-2.25,0) 7(-3.75,0) 8(-5.25,0)
87831-1041 [mm]
  round 1.3 hole 0.889: 1(4,1) 2(2,1) 3(0,1) 4(-2,1) 5(-4,1) 6(-4,-1) 7(-2,-1) 8(0,-1) 9(2,-1) 10(4,-1)
  silkscreen extent -6.3,-3.15 6.3,3.15, body extent -6.25,-3.1 6.2,3.1, height 6.4
DIODE_0805 [mm] "0805 SMD diode"
  rect 1.05x1.9 smd: 1(-0.95,0) 2(0.95,0)
  silkscreen extent -2.15,-1.5 2.6,1.5
FSM2JSMA [mm] "DPST SMD Switch Footprint"
  rect 1.4x2.1 smd paste-2.286: 1(2.248,4.55) 2(2.248,-4.55) 3(-2.248,-4.55) 4(-2.248,4.55)
  silkscreen extent -3,-3 3,3, body extent -2.97,-5.03 3.03,4.97, height 4.39
G_MOLEX_KK_3_HDR [mil]
  round 65 hole 40: 1(0,0) 2(0,-100) 3(0,-200)
  silkscreen extent -125,-250 125,50
G_MOLEX_KK_4_HDR [mil]
  round 65 hole 40: 1(0,0) 2(0,-100) 3(0,-200) 4(0,-300)
  silkscreen extent -125,-350 125,50
HC49/US [mm]
  rect 2x5.5 smd: 1(0.158,-4.91) 2(0.158,4.59)
  silkscreen extent -2.29,-5.86 2.61,5.54
HDR1X2 [mm] "Connector; Header; 2 Position"
  rect 1.5x1.5 hole 0.889: 1(0,0)
  round 1.5 hole 0.889: 2(2.54,0)
  silkscreen extent -1.27,-1.27 3.81,1.27
HDR1X4 [mm] "Connector; Header; 4 Position"
  rect 1.5x1.5 hole 0.889: 1(0,0)
  round 1.5 hole 0.889: 2(2.54,0) 3(5.08,0) 4(7.62,0)
  silkscreen extent -1.27,-1.27 8.89,1.27
HDR2X3 [mm] "Connector; Header; 3x2 Position"
  rect 1.5x1.5 hole 0.9: 1(0,0)
  round 1.5 hole 0.9: 2(0,2.54) 3(2.54,0) 4(2.54,2.54) 5(5.08,0) 6(5.08,2.54)
  silkscreen extent -1.27,-1.27 6.35,3.81
HDSM-541C [mm] "2 char 7 segment smt led display"
  rect 2x3 smd: 1(-5.08,-9.5) 2(-2.54,-9.5) 3(0,-9.5) 4(2.54,-9.5) 5(5.08,-9.5) 6(5.08,9.5) 7(2.54,9.5) 8(0,9.5) 9(-2.54,9.5) 10(-5.08,9.5)
  silkscreen extent -12.5,-9.5 12.5,9.5, body extent -12.5,-9.5 12.5,9.5, height 3.75
LQFP100_N [mm] "Thin QFP, 100-Leads, Body 14x14mm, Pitch 0.5mm, IPC Medium Density"
  oval 1.8x0.272 smd: 1(-7.55,6) 2(-7.55,5.5) 3(-7.55,5) 4(-7.55,4.5) 5(-7.55,4) 6(-7.55,3.5) 7(-7.55,3) 8(-7.55,2.5) 9(-7.55,2) 10(-7.55,1.5) 11(-7.55,1) 12(-7.55,0.5) 13(-7.55,0) 14(-7.55,-0.5) 15(-7.55,-1) 16(-7.55,-1.5) 17(-7.55,-2) 18(-7.55,-2.5) 19(-7.55,-3) 20(-7.55,-3.5) 21(-7.55,-4) 22(-7.55,-4.5) 23(-7.55,-5) 24(-7.55,-5.5) 25(-7.55,-6) 51(7.55,-6) 52(7.55,-5.5) 53(7.55,-5) 54(7.55,-4.5) 55(7.55,-4) 56(7.55,-3.5) 57(7.55,-3) 58(7.55,-2.5) 59(7.55,-2) 60(7.55,-1.5) 61(7.55,-1) 62(7.55,-0.5) 63(7.55,0) 64(7.55,0.5) 65(7.55,1) 66(7.55,1.5) 67(7.55,2) 68(7.55,2.5) 69(7.55,3) 70(7.55,3.5) 71(7.55,4) 72(7.55,4.5) 73(7.55,5) 74(7.55,5.5) 75(7.55,6)
  oval 0.272x1.8 smd: 26(-6,-7.55) 27(-5.5,-7.55) 28(-5,-7.55) 29(-4.5,-7.55) 30(-4,-7.55) 31(-3.5,-7.55) 32(-3,-7.55) 33(-2.5,-7.55) 34(-2,-7.55) 35(-1.5,-7.55) 36(-1,-7.55) 37(-0.5,-7.55) 38(0,-7.55) 39(0.5,-7.55) 40(1,-7.55) 41(1.5,-7.55) 42(2,-7.55) 43(2.5,-7.55) 44(3,-7.55) 45(3.5,-7.55) 46(4,-7.55) 47(4.5,-7.55) 48(5,-7.55) 49(5.5,-7.55) 50(6,-7.55) 76(6,7.55) 77(5.5,7.55) 78(5,7.55) 79(4.5,7.55) 80(4,7.55) 81(3.5,7.55) 82(3,7.55) 83(2.5,7.55) 84(2,7.55) 85(1.5,7.55) 86(1,7.55) 87(0.5,7.55) 88(0,7.55) 89(-0.5,7.55) 90(-1,7.55) 91(-1.5,7.55) 92(-2,7.55) 93(-2.5,7.55) 94(-3,7.55) 95(-3.5,7.55) 96(-4,7.55) 97(-4.5,7.55) 98(-5,7.55) 99(-5.5,7.55) 100(-6,7.55)
  silkscreen extent -7.67,-6.25 6.25,6.82, body extent -7,-7 7,7, height 1.6
MTC16_N [mm] "TSOP, 16-Leads, Body 5x4.4mm, Pitch 0.65mm, IPC Medium Density"
  oval 1.7x0.35 smd: 1(-2.85,2.275) 2(-2.85,1.625) 3(-2.85,0.975) 4(-2.85,0.325) 5(-2.85,-0.325) 6(-2.85,-0.975) 7(-2.85,-1.625) 8(-2.85,-2.275) 9(2.85,-2.275) 10(2.85,-1.625) 11(2.85,-0.975) 12(2.85,-0.325) 13(2.85,0.325) 14(2.85,0.975) 15(2.85,1.625) 16(2.85,2.275)
  silkscreen extent -2.97,-2.55 1.6,3.12, body extent -2.25,-2.55 2.25,2.55, height 1.1
RJSSE-5381-02 [mm]
  rect 6.223x3.175 smd: 0(1.2,4.55) 0(27.25,4.55)
  rect 0.559x2.54 smd: 1(26.6,13.05) 2(25.325,13.05) 3(24.05,13.05) 4(22.775,13.05) 5(21.5,13.05) 6(20.25,13.05) 7(18.975,13.05) 8(17.7,13.05) 9(10.85,13.025) 10(9.575,13.025) 11(8.3,13.025) 12(7.025,13.025) 13(5.75,13.05) 14(4.5,13.05) 15(3.225,13.05) 16(1.95,13.05)
  rect 1.05x1.9 smd: 17(28.5,17.225) 18(26.6,17.225) 19(17.6,17.225) 20(15.7,17.225) 21(12.75,17.175) 22(10.85,17.175) 23(1.85,17.175) 24(-0.05,17.175)
  round 3.15 hole 2.794: ""(0,0) ""(28.45,0)
  silkscreen extent -2,-4.3 30.4,17.53, body extent -2,-4.3 30.4,11.5, height 14.85
SOIC127P600-8L [mm] "SOIC, 8-Leads, Body 4.9x3.9mm, Pitch 1.27mm, IPC High Density"
  oval 1.9x0.6 smd: 1(-2.35,1.905) 2(-2.35,0.635) 3(-2.35,-0.635) 4(-2.35,-1.905) 5(2.35,-1.905) 6(2.35,-0.635) 7(2.35,0.635) 8(2.35,1.905)
  silkscreen extent -2.48,-2.5 1,2.88, body extent -2,-2.5 2,2.5, height 1.75
SOIC127P600X150-8N [mm] "SOIC, 8-Leads, Body 5.0x3.9mm (max), Pitch 1.27mm, IPC Medium Density"
  oval 1.8x0.6 smd: 1(-2.575,1.905) 2(-2.575,0.635) 3(-2.575,-0.635) 4(-2.575,-1.905) 5(2.575,-1.905) 6(2.575,-0.635) 7(2.575,0.635) 8(2.575,1.905)
  silkscreen extent -2.7,-2.5 1.27,2.88, body extent -1.95,-2.5 1.95,2.5, height 1.5
SOP127P780X200-16N [mm] "SOP, 16-Leads, Body 10.5x5.6mm (max), Pitch 1.27mm, IPC Medium Density"
  oval 2.15x0.6 smd: 1(-3.4,4.445) 2(-3.4,3.175) 3(-3.4,1.905) 4(-3.4,0.635) 5(-3.4,-0.635) 6(-3.4,-1.905) 7(-3.4,-3.175) 8(-3.4,-4.445) 9(3.4,-4.445) 10(3.4,-3.175) 11(3.4,-1.905) 12(3.4,-0.635) 13(3.4,0.635) 14(3.4,1.905) 15(3.4,3.175) 16(3.4,4.445)
  silkscreen extent -3.52,-5.25 1.92,5.42, body extent -2.8,-5.25 2.8,5.25, height 2
SOT23 [mm] "SOT-23; 3 Leads; Body 3.0 x 2.6 mm, inc. leads (LxW max)"
  rect 0.9x0.95 smd: 1(-0.95,-1.25) 2(0.95,-1.25) 3(0,1.25)
  silkscreen extent -2.07,-1.38 1.3,1.25
TEST_POINT_4X2MM [mm] "Test Point Pad"
  rect 4x2 smd: 1(0,0)
TO170P1524X483-6N [mm] "D2-PAK, 6-Pads, Body 9.6x10.7mm (max), IPC Medium Density"
  rect 4.2x1 smd: 1(-6.25,3.4) 2(-6.25,1.7) 3(-6.25,0) 4(-6.25,-1.7) 5(-6.25,-3.4)
  rect 9.3x7.3 smd: 6(3.75,0)
  silkscreen extent -6.38,-5.35 -1.3,5.35, body extent -3.1,-5.33 6.55,5.33, height 4.83
TSOP65P490X110_HS-8N [mm] "TSOP, 8-Leads, Body 3.1x3.1mm (max), Pitch 0.65mm, IPC Medium Density"
  rect 1.6x0.4 smd: 1(-2.125,0.975) 2(-2.125,0.325) 3(-2.125,-0.325) 4(-2.125,-0.975) 5(2.125,-0.975) 6(2.125,-0.325) 7(2.125,0.325) 8(2.125,0.975)
  rect 1.9x2.2 smd: 9(0,0)
  silkscreen extent -2.25,-1.55 0.92,1.88, body extent -1.55,-1.55 1.55,1.55, height 1.1
TSOP65P640X110-20N [mm] "TSOP, 20-Leads, Body 6.6x4.5mm (max), Pitch 0.65mm, IPC Medium Density"
  oval 1.6x0.35 smd: 1(-2.875,2.925) 2(-2.875,2.275) 3(-2.875,1.625) 4(-2.875,0.975) 5(-2.875,0.325) 6(-2.875,-0.325) 7(-2.875,-0.975) 8(-2.875,-1.625) 9(-2.875,-2.275) 10(-2.875,-2.925) 11(2.875,-2.925) 12(2.875,-2.275) 13(2.875,-1.625) 14(2.875,-0.975) 15(2.875,-0.325) 16(2.875,0.325) 17(2.875,0.975) 18(2.875,1.625) 19(2.875,2.275) 20(2.875,2.925)
  silkscreen extent -3,-3.3 1.68,3.77, body extent -2.25,-3.3 2.25,3.3, height 1.1
"USB Mini-B" [mm]
  round 1.245 hole 0.889: 0(5.25,-2.2) 0(5.25,2.2)
  rect 2.3x0.5 smd: 1(7.85,1.6) 2(7.85,0.8) 3(7.85,0) 4(7.85,-0.8) 5(7.85,-1.6)
  rect 2.5x2 smd: 5(2.25,4.45) 5(2.25,-4.45) 5(7.75,-4.45) 5(7.75,4.45)
  silkscreen extent 0,-5.5 9.25,5.5, body extent 0,-5.5 9.25,5.5, height 3.95

## Part data
*: "RJ45 SMT Right Angle x2"
C1 C5 C15 C19: library part "CP_10nF 0603", "CAP CER 10000PF 100V X7R 0603"
C2 C6 C7 C9 C16 C17 C18 C22 C23 C24 C25 C26 C29 C30 C31 C32 C33 C34 C35 C36 C37 C38 C39 C42 C43 C44 C45 C46 C47: library part "CP_100nF 0603", "CAP CER .10UF 50V X5R 0603"
C3: library part "CP_47uF 10V 1210", "CAP CER 47uF 10V X5R 1210"
C4 C40 C41: library part CP_16pF_100V_0603, "CAP CER 16PF 100V 5% C0G 0603"
C12 C13 C20: library part "CP_10uF 0805", "CAP 10uF 10% 10V X5R 0805"
C14 C21: library part CP_TANT_22uF_35V, "CAP TANT 22UF 35V 10% SMD"
C27: library part "CP_4u7 0603", "CAP CER 4.7UF 10V X5R 0603"
C28: library part CP_2u2F_10V_0603, "CAP CER 2.2UF 10V 10% X5R 0603"
C48: "CAP CER 75PF 50V 5% C0G 0603"
C49: library part CP_1uF_50V_0603, "CAP CER 1.0UF 50V X7R 0603"
D_Power: library part "DL_LED Green 0805", "Green LED 0805"
ERASE1 JTAGESEL1 P_PWM P_SD: "Header, 2-Pin"
H_Encoder H_LA_&_Speed USART0 USART1: "5-pin PicoBlade Right-angle Header"
P2: library part "USB Mini B"
P6: library part "Header 4", "Header, 4-Pin"
P_Act: "HEADER MALE 10POS VERT W/LOCK"
P_Batt: library part JP_MOLEX_KK_3POS, "CONN HEADER 3POS .100 VERT TIN"
P_Break_&_Limit: "Header, 3-Pin, Dual row"
P_Ext_Pwr: library part JP_MOLEX_KK_4POS, "CONN HEADER 4POS .100 VERT TIN"
Q1 Q2 Q3: library part TF_ZXM61P02F, "20V P-channel enhancement mode MOSFET"
R1 R4 R27 R28 R29 R32 R35 R36: library part "RS_100R 0603", "RES 100 OHM 1/10W 1% 0603 SMD"
R2 R3 R5 R26 R30 R31 R33 R34: library part "RS_0R0 0603", "RES 0.0 OHM 1/10W 5% 0603 SMD"
R7 R8 R51 R56 R59 R60: library part "RS_1k 0603", "RES 1.00K OHM 1/10W 1% 0603 SMD"
R9: library part RS_6k81_0603, "RES 6k81 OHM 1/10W 1% 0603 SMD"
R10: library part "RS_3k9 0603", "RES 3.9K OHM 1/10W 5% 0603 SMD"
R11 R12 R13 R45 R52 R54 R57 R63 R65: library part "RS_10k 0603", "RES 10.0K OHM 1/10W 1% 0603 SMD"
R17 R18: library part "RS_180R 0603", "RES 180OHM 1/10W 1% 0603 SMD"
R19 R20 R21 R22 R23 R24 R25: library part "RS_150R 0603", "RES 150 OHM 1/10W 1% 0603 SMD"
R37 R38 R39 R40: library part "RS_560R 0603", "RES 560 OHM 1/10W 1% 0603 SMD"
R46 R47 R48 R49: library part "RS_100k 0603", "RES 100K OHM 1/10W 1% 0603 SMD"
R50 R53 R55 R58 R61: library part "RS_330R 0603", "RES 330 OHM 1/10W 1% 0603 SMD"
R62: library part "RS_30k 0603", "RES 30K OHM 1/10W 1% 0603 SMD"
R64: library part "RS_3k3 0603", "RES 3.3K OHM 1/10W 5% 0603 SMD"
R66: library part "RS_2k7 0603", "RES 2.7K OHM 1/10W 5% 0603 SMD"
R67: library part "RS_220k 0603", "RES 3.3K OHM 1/10W 5% 0603 SMD"
R68: library part "RS_470k 0603", "RES 470K OHM 1/10W 5% 0603 SMD"
R69: library part "RS_1k5 0603", "RES 1.5K OHM 1/10W 5% 0603 SMD"
R70: library part "RS_27k 0603", "RES 27K OHM 1/10W 1% 0603 SMD"
R71 R72: library part "RS_27R 0603", "RES 27 OHM 1/10W 1% 0603 SMD"
R73: library part "RS_47k 0603", "RES 47.0K OHM 1/10W 1% 0603 SMD"
R74 R75: library part "RS_330K 0603"
SPI0 SPI1_5: "7-pin PicoBlade Right-angle Header"
SW0 SW1 SW2 SW3 SW_Reset: library part SW_FSM2JSMA, "DPST SMD Switch"
TP_3.3 TP_3.3_M TP_3.3_T TP_5 TP_5_T TP_12 TP_12_T TP_ACC_CUR_RAW TP_ACC_CUR_SENSE TP_ACC_PWM TP_ACC_SD TP_ACT_PWM TP_ACT_PWM_B TP_CAN_RXD TP_CAN_TXD TP_CANH TP_CANL TP_DDM TP_DDP TP_DISABLE TP_En_Count_1 TP_En_Count_2 TP_Encoder_A TP_Encoder_B TP_Erase TP_FAULT TP_GND TP_GND_M TP_GND_T TP_LED_A TP_LED_B TP_LED_BI/BRO TP_LED_C TP_LED_D TP_LED_LEFT TP_LED_RIGHT TP_LED_Sa TP_LED_Sb TP_LED_Sc TP_LED_Sd TP_LED_Se TP_LED_Sf TP_LED_Sg TP_MONITOR TP_OTW TP_Reset TP_RESET_AB TP_RESET_CD TP_S0 TP_S1 TP_S2 TP_S3 TP_Speed_H TP_Speed_L TP_SPI0_CS0 TP_SPI0_CS1 TP_SPI0_CS2 TP_SPI0_CS3 TP_SPI0_MISO TP_SPI0_MOSI TP_SPI0_SPCK TP_SPI1_CS0 TP_SPI1_CS1 TP_SPI1_CS2 TP_SPI1_MISO TP_SPI1_MOSI TP_SPI1_SPCK TP_URT_CTS0 TP_URT_CTS1 TP_URT_RTS0 TP_URT_RTS1 TP_URT_RXD0 TP_URT_RXD1 TP_URT_SCK0 TP_URT_SCK1 TP_URT_TXD0 TP_URT_TXD1 TP_V_BATT: library part TP_TESTPOINT, "Test-Point"
U3: "2 character 7 segment display"
U5: "Smart ARM Microcontroller, ARM7TDMI 32-Bit RISC CPU, 256KB Flash and 64KB SRAM, 100-Pin LQFP, Industrial, Pb-Free"
U9: "7-Channel, 500 KSPS, 12-Bit A/D Converter"

## Free pads (board coordinates)
  round 124 hole 110: 1(15046,9649) 3(15046,11575) 5(10760,11575) 7(10760,9649)

## Via types
v1: diameter 25, hole 15, Signal Layer 1 to Signal Layer 2, 324 vias
v2: diameter 40, hole 25, Signal Layer 1 to Signal Layer 2, 10 vias
v3: diameter 30, hole 15, Signal Layer 1 to Signal Layer 2, 4 vias

## Nets (pads, with @x,y where several pads share a name; then routed paths per layer and width w, separated by ;. In a path a pad name is that pad's centre, name@x,y a point inside that pad or via, vN(x,y) a via of type N, cw(c..) or ccw(c..) an arc to the next point about the centre after c; other vN are vias at no path point)
ACC_PWM: U5.66 U_SPI.18 | length 1014.6
  Signal Layer 1 w6: U5.66@12339.24,10662.06 12467.94,10662.06 12525,10605 v1(12525,10265)
  Signal Layer 1 w7: U_SPI.18@12367.02,9950.19 12367.02,10252.02 v1(12380,10265)
  Signal Layer 2 w6: v1(12380,10265) v1(12525,10265)
ACC_PWM_5: P_PWM.1 TP_ACC_PWM.1 U_SPI.3 | length 345.1
  Signal Layer 1 w7: U_SPI.3@12367.02,9723.81 12367.02,9602.98 12474,9496 P_PWM.1@12474,9423
  other v1: 12472,9498
ACC_SD: U5.53 U_SPI.20 | length 553.4
  Signal Layer 1 w6: U5.53@12339.24,10406.15 12398.85,10406.15
  Signal Layer 1 w7: U_SPI.20@12317,9951.35 12317,10032 12354.02,10069.02 12354.02,10271.02 12405,10322 12405,10400 12398.85,10406.15
ACC_SD_5: P_SD.1 TP_ACC_SD.1 U_SPI.1 | length 316.6
  Signal Layer 1 w7: U_SPI.1@12315.84,9723.81 12315.84,9584.16 12354,9546 P_SD.1@12354,9423
  other v1: 12353,9545
ACT_FAULT: P_Act.4 TP_FAULT.1 U5.31 | length 1642.1
  Signal Layer 1 w6: U5.31@11904.2,10305.76 11904.2,10185.8 11947,10143 v1(11947,10122) ; v1(12241,10113) 12278,10113 12332,10167 v1(12332,10166) ; v1(12524,10167) 12582,10225 12582,10635.11 12610.89,10664 12689.63,10664 P_Act.4@12729.37,10703.74
  Signal Layer 2 w6: v1(11947,10122) 11981.13,10156.13 11981.13,10198.91 11993.72,10211.5 12106.18,10211.5 12204.68,10113 v1(12241,10113) ; v1(12332,10166) 12332,10167 v1(12524,10167) ; P_Act.4@12729.37,10703.74 TP_FAULT.1@12797.74,10703.74
ACT_OTW: P_Act.9 TP_OTW.1 U5.30 | length 1251.2
  Signal Layer 1 w6: U5.30@11884.52,10305.76 11884.52,10169.48 v1(11888,10166) ; P_Act.9@12650.63,10546.26 12690,10506.89 12690,10419 v1(12654,10383)
  Signal Layer 2 w6: TP_OTW.1@11838,10166 v1(11888,10166) ; v1@11892,10166 11977.99,10251.99 12066.01,10251.99 12134.03,10320 12342.59,10320 12359.09,10303.5 12574.5,10303.5 v1(12654,10383)
ACT_PWM_A: P_Act.1 TP_ACT_PWM.1 U5.64 | length 422.6
  Signal Layer 1 w6: U5.64@12339.24,10622.68 12402.32,10622.68 12500.5,10524.5 v1@12500.5,10507.5
  Signal Layer 2 w6: TP_ACT_PWM.1@12542,10507 12689.89,10507 P_Act.1@12729.37,10467.52
  other v1: 12503,10509
ACT_PWM_B: P_Act.2 TP_ACT_PWM_B.1 U5.65 | length 296.6
  Signal Layer 1 w6: U5.65@12339.24,10642.37 12449.63,10642.37 v1(12478,10614)
  Signal Layer 2 w6: TP_ACT_PWM_B.1@12601.59,10590.41 12685.22,10590.41 P_Act.2@12729.37,10546.26
ACT_RESET_AB: P_Act.5 TP_RESET_AB.1 U5.29 | length 1858.1
  Signal Layer 1 w6: U5.29@11864.83,10305.76 11864.83,10134.17 v1(11879,10120) ; v1(12241,10152) 12278,10152 12324,10198 v1@12325,10198 ; v1(12328,10205) 12328,10201 v1@12325,10198 ; v1(12523,10206) 12536,10206 12570,10240 12570,10701.85 12611,10742.85 12689.74,10742.85 P_Act.5@12729.37,10782.48 ; v1@12325,10198 12324,10197 12331,10197 12332,10198 v1@12325,10198
  Signal Layer 2 w6: v1(11879,10120) 11914,10120 11969.13,10175.13 11969.13,10203.88 11988.75,10223.5 12111.15,10223.5 12182.65,10152 v1(12241,10152) ; v1(12328,10205) 12328,10201 12324,10197 12331,10197 12340,10206 v1(12523,10206) ; TP_RESET_AB.1@12668,10916 12729.37,10854.63 P_Act.5@12729.37,10782.48
ACT_RESET_CD: P_Act.10 TP_RESET_CD.1 U5.34 | length 1182.2
  Signal Layer 1 w6: v1(11943,10186) 11963.26,10206.26 U5.34@11963.26,10305.76
  Signal Layer 2 w6: v1(11943,10186) 11943,10194.72 11986.28,10238 12069,10238 12139,10308 12337.62,10308 12354.12,10291.5 12603.51,10291.5 12685,10372.99 12685,10433.15 ; P_Act.10@12650.63,10467.52 12685,10433.15 ; TP_RESET_CD.1@12791.93,10432.93 12685.22,10432.93 12685,10433.15
AD6: U5.5
ADTRG: U5.63
BRAKE_SWITCH: P_Break_&_Limit.2 R11.1 U5.12 | length 4588.2
  Signal Layer 1 w6: v1@11655.32,10622.68 11685,10622.68 U5.12@11744.76,10622.68
  Signal Layer 1 w7: v1(11421,10303) 11414,10304.89 11601,10491.89 11601,10492 v1@11619.5,10510.5 ; v1(11514.84,10029.84) v1@11514.84,10209.16 ; v1(11652,10626) v1@11655.32,10622.68 ; v1@11928,9883 11931,9886 v1(11931,9890) 11936,9890 11995,9831 v1@11995,9690
  Signal Layer 2 w6: P_Break_&_Limit.2@14660,9494 14660,9527 R11.1@14697,9564
  Signal Layer 2 w7: v1(11421,10303) v1@11510,10214 ; v1(11514.84,10029.84) 11653.68,9891 11920,9891 11928,9883 11931,9886 v1(11931,9890) ; v1@11625.32,10514.32 11639.58,10528.58 11639.58,10613.58 v1(11652,10626) ; v1@11999,9680 12026,9653 12026,9646.89 12061.89,9611 12213.31,9611 12244.24,9580.07 12244.24,9457.53 12325.01,9376.76 12529.24,9376.76 12586,9320 14486,9320 14594.97,9428.97 14594.97,9438.23 14650.74,9494 P_Break_&_Limit.2@14660,9494
  other v1: 11995,9684 11514,10210 11620,10510
CAN_RXD: C4.2 TP_CAN_RXD.1 U4.4 U5.46 | length 3001.3
  Signal Layer 1 w6.42: 12199.48,10245 U5.46@12199.48,10305.76
  Signal Layer 1 w7: 12199.48,10245 12199.48,9962.84 12315.82,9846.5 12681.5,9846.5 13674.5,10839.5 14143.5,10839.5 v1(14179,10804) U4.4@14242.62,10804
  Signal Layer 2 w7: TP_CAN_RXD.1@13457,10693 v1(13534,10693) ; v1(14179,10804) C4.2@14243.06,10804
CAN_STATUS_A2: R38.1 U5.44 | length 3483.8
  Signal Layer 1 w6: U5.44@12160.11,10305.76 12160.11,10245 12167.8,10237.31 12167.8,9959.88 12305.67,9822 12727.97,9822 13720.97,10815 14055,10815 v1(14110,10760) ; v1(14440,11025) 14477.96,11025 v1(14569,10933.96)
  Signal Layer 2 w6: v1(14110,10760) 14114.81,10764.81 14259.81,10764.81 14405,10910 14405,10990 v1(14440,11025)
  Signal Layer 2 w7: v1(14569,10933.96) R38.1@14569,10981.91
CAN_STATUS_B2: R40.1 U5.45 | length 3595
  Signal Layer 1 w6: U5.45@12179.8,10305.76 12179.8,9964.85 12310.64,9834 12723,9834 13716,10827 14098,10827 14180,10745 14375,10745 14569,10551 v1(14569,10313.88)
  Signal Layer 2 w7: v1(14569,10313.88) R40.1@14569,10361.83
CAN_TXD: TP_CAN_TXD.1 U4.1 U5.47 | length 2937.1
  Signal Layer 1 w6: U5.47@12219.17,10305.76 12219.17,9960.83 12321,9859 12636,9859 13629,10852 14037,10852 14139,10954 U4.1@14242.62,10954
  Signal Layer 2 w6: TP_CAN_TXD.1@13484,10781 v1(13557,10781)
CANH: R2.2 R3.1 R30.2 R31.1 TP_CANH.1 U4.7 | length 1517.1
  Signal Layer 1 w7: U4.7@14445.38,10904 v1(14509,10904) ; v1@14510.07,10905.07 14509,10905.07 v1(14509,10904) ; R30.2@14694.94,10504 v1(14654,10504) 14609,10504 14599,10514 14599,10889 14584,10904 ; R2.2@14694.94,11124 v1(14654,11124) 14609,11124 14599,11114 14599,10919 14584,10904 ; v1(14509,10904) 14584,10904
  Signal Layer 2 w7: v1(14654,10504) R31.1@14694.94,10504 ; v1(14654,11124) R3.1@14688,11124 ; R3.1@14694.94,11117.06 14694.94,11056.06 14745,11006 ; 14746,11005 14763,10988 TP_CANH.1@15096,10988
CANL: R5.2 R26.1 R33.2 R34.1 TP_CANL.1 U4.6 | length 1568
  Signal Layer 1 w7: U4.6@14445.38,10854 v1(14509,10854) ; v1(14654,10579) R33.2@14694.94,10579 ; v1(14654,11199) R5.2@14694.94,11199
  Signal Layer 2 w7: R34.1@14694.94,10579 v1(14654,10579) 14584,10579 14510,10653 14510,10853 v1(14509,10854) 14469,10894 14469,11089 14579,11199 v1(14654,11199) R26.1@14694.94,11199 ; R34.1@14695,10589 14695,10633 14766,10704 TP_CANL.1@15104,10704
CTS0: TP_URT_CTS0.1 U5.88 USART0.1 | length 1677.4
  Signal Layer 1 w6: 10926.57,11531.43 11023,11435 11640,11435 12033.5,11041.5 12033.5,11041.09 12042,11032.59 U5.88@12042,10900.24 ; 10926.57,11533 USART0.1@10926.57,11710
  Signal Layer 1 w7: v1(10885,11543) 10895,11533 10926.57,11533
CTS1: TP_URT_CTS1.1 U5.14 USART1.1 | length 1642.7
  Signal Layer 1 w6: USART1.1@10630,11221.57 10865,11221.57 ; 10876.43,11221.57 10865,11221.57 ; 11218.52,10903.48 11216,10906 ; U5.14@11744.76,10583.32 11538.68,10583.32 11216,10906 ; 10865,11221.57 10900.43,11221.57 11216,10906
  Signal Layer 2 w6: TP_URT_CTS1.1@10749,11079 10883,11079 v1(10964,11160)
"CURRENT SENSE": C7.2 R10.2 TP_ACC_CUR_RAW.1 U9.6 | length 234
  Signal Layer 1 w6: v1@10957,10386 U9.6@11040,10386
  Signal Layer 2 w6: R10.2@10877,10428.94 C7.2@10951,10428.94 ; TP_ACC_CUR_RAW.1@10951,10344 v1(10951,10386) ; v1@10953,10384 C7.2@10953,10419
DRXD: U5.73
DTXD: U5.74
ERASE: ERASE1.2 R51.2 TP_Erase.1 U5.92 | length 896.9
  Signal Layer 1 w6: U5.92@11963.26,10900.24 11963.26,11001.74
  Signal Layer 1 w7: v1(11925,11040) 11963.26,11001.74
  Signal Layer 2 w7: R51.2@11849.06,11713 ERASE1.2@11912,11713 11912,11053 v1(11925,11040)
GND: *.0 *.7 *.15 *.18 *.20 *.22 *.24 C1.1 C2.2 C3.2 C4.1 C5.1 C6.1 C7.1 C9.2 C10.1 C11.1 C12.1 C13.2 C14.2 C16.1 C17.1 C18.1 C19.1 C20.2 C21.2 C22.1 C23.1 C24.1 C25.2 C26.2 C27.2 C28.2 C29.2 C30.2 C31.2 C32.2 C33.2 C34.2 C35.2 C36.2 C37.2 C38.2 C39.2 C40.1 C41.2 C42.1 C43.2 C44.1 C45.1 C46.1 C47.1 C48.1 C49.1 D_Power.2 H_Encoder.1 H_Encoder.5 H_LA_&_Speed.1 JTAG.8 P2.5 P6.2 P_Act.3 P_Act.6 P_Batt.2 P_Batt.3 P_Ext_Pwr.1 P_PWM.2 P_SD.2 R6.1 R11.2 R12.2 R13.2 R51.1 R56.1 R59.1 R61.1 R64.1 R68.1 R73.1 R74.1 R75.1 SW0.1 SW0.2 SW1.1 SW1.2 SW2.1 SW2.2 SW3.1 SW3.2 TP_GND.1 TP_GND_M.1 TP_GND_T.1 U1.3 U2.8 U4.2 U4.8 U5.2 U5.16 U5.32 U5.52 U5.68 U5.83 U5.96 U6.3 U6.4 U6.9 U7.3 U8.3 U9.2 U9.4 U9.12 U_SPI.11 | length 4864.6
  Signal Layer 1 w6: v1(11677,10819.54) U5.2@11744.76,10819.54 ; v1@11683.89,10543.94 U5.16@11744.76,10543.94 ; v1(11865.15,10818) 11884.52,10837.37 U5.96@11884.52,10900.24 ; v1@11923.89,10243 U5.32@11923.89,10305.76 ; U5.83@12140.43,10900.24 12140.43,10949.57 ; v1(12167,10447) 12215.83,10447 12276.37,10386.46 U5.52@12339.24,10386.46 ; v1(12257,10701.43) U5.68@12339.24,10701.43
  Signal Layer 1 w7: U9.4@11040,10436 v1@11095,10436 ; U9.2@11040.8,10487.98 v1@11089,10487.98 ; v1@11216,10411.2 U9.12@11265.2,10411.2 ; v1(12509,9890) U_SPI.11@12546.16,9927.16 ; v1(13072,9703) U2.8@13143.14,9703 ; U1.3@13890.52,11578 v1(13951,11578) ; v1(14179,10904) U4.2@14242.62,10904 ; U6.9@14241.69,11344.52 U6.4@14241.69,11429.8 ; U6.9@14267.28,11358.93 U6.3@14267.28,11429.8 ; U4.8@14445.38,10954 v1(14509,10954) ; v1(14759,10415.97) *.15@14835.22,10415.97 ; v1(14759,11036.05) *.7@14835.22,11036.05 ; v1(15062,10030.99) P2.5@15137.94,10030.99 ; P2.5@15141.88,10143.2 v1(15358.42,10143.2)
  Signal Layer 1 w10: D_Power.2@14682,11774.4 P_Batt.3@14814.4,11774.4
  Signal Layer 2 w6: v1@11943.57,10243 C30.2@11943.57,10275 ; C30.2@11955.94,10283.94 C33.2@12022,10283.94
  Signal Layer 2 w7: C44.1@10488.52,10831 v1(10537,10831) ; C6.1@10802,10547 10861,10547 v1(10862,10548) ; C7.1@10951,10488 v1(10951,10524) ; v1(11017,9478) C47.1@11017,9526.48 ; C48.1@11363,10379 C49.1@11443,10379 ; C25.2@11454,10692.94 C27.2@11544,10692.94 ; C26.2@11454,10876.06 v1(11499,10876.06) C28.2@11544,10876.06 ; v1(11497,9478) C45.1@11497,9526.48 ; C41.2@11514.06,11046.78 v1(11560,11046.78) ; v1(11636.78,11046.78) C40.1@11680,11046.78 ; C29.2@11722.94,10503 v1(11682.94,10543) C31.2@11722.94,10583 ; R51.1@11790,11713 v1(11790,11760) ; C39.2@11825.15,10922.06 11865.15,10882.06 ; v1(11865.15,10818) 11865.15,10882.06 ; C38.2@11904.2,10921.11 11865.15,10882.06 ; v1@11938,9352.09 C9.2@11938,9470.94 ; v1(11938.57,9351.52) R61.1@11983,9351.52 ; C10.1@11981,10619 C11.1@11981,10694 ; C37.2@12042,10922.06 C36.2@12120.74,10922.06 ; C36.2@12131,10932.31 v1(12131,10959) ; R56.1@12155,11713 v1(12155,11760) ; v1(12170,9897) C42.1@12221,9897 ; v1(12171,9777) C43.2@12221.94,9777 ; C32.2@12238.85,10283.94 v1(12306,10283.94) ; R59.1@12361.06,10458.94 C34.2@12361.06,10518.94 ; C34.2@12361.06,10533 v1(12401.06,10573) C35.2@12361.06,10613 ; C46.1@12482,11668.52 v1(12482,11717) ; v1(13171.57,11700) 13185,11686.57 R68.1@13185,11650 ; v1(13449.69,10857) C14.2@13449.69,10961.88 ; C18.1@13603,11097 v1(13644.06,11097) ; v1(13637,10653) C22.1@13682,10653 ; v1(13687,10263) C20.2@13687,10308 ; C17.1@13703,11292 v1(13703,11337) ; v1(13772,10278) C23.1@13772,10323 ; C13.2@13787.02,11309.4 v1(13787.02,11354.4) ; C16.1@13803,10962 v1(13848,10962) ; v1(13835.94,10518) C24.1@13877,10518 ; R6.1@13900,11420 v1(13949.94,11420) ; C21.2@14035.31,10653.12 v1(14035.31,10758) ; C3.2@14055.06,10908.06 C2.2@14129,10908.06 ; C2.2@14133.06,10904 v1(14179,10904) ; v1(14244,10699) C4.1@14244,10744 ; R11.2@14697,9623.06 R12.2@14769,9623.06 R13.2@14841,9623.06 v2(14890,9623.06) ; v1(14807,10113) R73.1@14852,10113 ; v1(14927,9833) R74.1@14927,9878 ; v1(15002,9863) R75.1@15002,9908 ; C5.1@15029,10539 v1(15074,10539) ; C1.1@15029,11159 v1(15074,11159)
  other v1: 10762.87,9349.52 11242.87,9349.52 15141.88,9792.8 15358.42,9792.8 11629,10185 11934,10239 14672.82,10287.03 15173,10338 11403,10379 11213,10411 11093,10436 11093,10489 10665.48,10576.87 11981,10654 11499,10692.94 14672.82,10716.17 14670.85,10907.11 14670.85,11336.24 15176,11358 12171,11398 14807,11543 11791.69,11640 13696.57,11700 13893.43,11700 12736.13,11845.48 11791.69,11880
  other v2: 14280.07,11346.13
IRQ0: U5.80
JTAGSEL: JTAGESEL1.2 R56.2 U5.77 | length 1072
  Signal Layer 1 w6: v1(12258.54,10825) U5.77@12258.54,10900.24
  Signal Layer 2 w6: R56.2@12106.94,11702 12258.54,11550.41 v1(12258.54,10825)
  Signal Layer 2 w7: JTAGESEL1.2@12032,11713 R56.2@12089,11713
LED_A: TP_LED_A.1 U2.7 U5.40 | length 1466.5
  Signal Layer 1 w6: v1(12079.56,10010) 12079.56,10168.91 12081.37,10170.72 U5.40@12081.37,10305.76
  Signal Layer 1 w7: v1(13072,9753) U2.7@13143.14,9753
  Signal Layer 2 w7: v1(12079.56,10010) 12159.56,9930 12676,9930 12853,9753 v1(13072,9753)
LED_B: TP_LED_B.1 U2.1 U5.41 | length 1284.4
  Signal Layer 1 w6: v1(12101.06,10160) U5.41@12101.06,10305.76
  Signal Layer 1 w7: v1(13072,10053) U2.1@13143.14,10053
  Signal Layer 2 w7: v1(12101.06,10160) 12261.06,10000 12316.94,10000 12326.94,9990 12355.93,9990 12364.93,9999 12796,9999 12850,10053 v1(13072,10053)
LED_C: TP_LED_C.1 U2.2 U5.42 | length 1289.7
  Signal Layer 1 w6: 12120.74,10171.43 U5.42@12120.74,10305.76
  Signal Layer 1 w7: v1@12120.74,10099.26 12120.74,10146.26 ; 12123.06,10148.57 12123.06,10169.11 ; v1(13072,10003) U2.2@13143.14,10003
  Signal Layer 2 w7: v1(12115,10095) 12135,10075 12156.77,10075 12244.77,9987 12311.55,9987 12321.55,9977 12361.32,9977 12370.32,9986 12840,9986 12857,10003 v1(13072,10003)
LED_D: TP_LED_D.1 U2.6 U5.43 | length 1362.1
  Signal Layer 1 w6: v1(12140.43,10040) U5.43@12140.43,10305.76
  Signal Layer 1 w7: v1(13072,9803) U2.6@13143.14,9803
  Signal Layer 2 w7: v1@12145,10040 12155,10040 12250,9945 12704.38,9945 12846.38,9803 v1(13072,9803)